# EAGLE board milliLearn-ice40 (EAGLE 9.5.1)
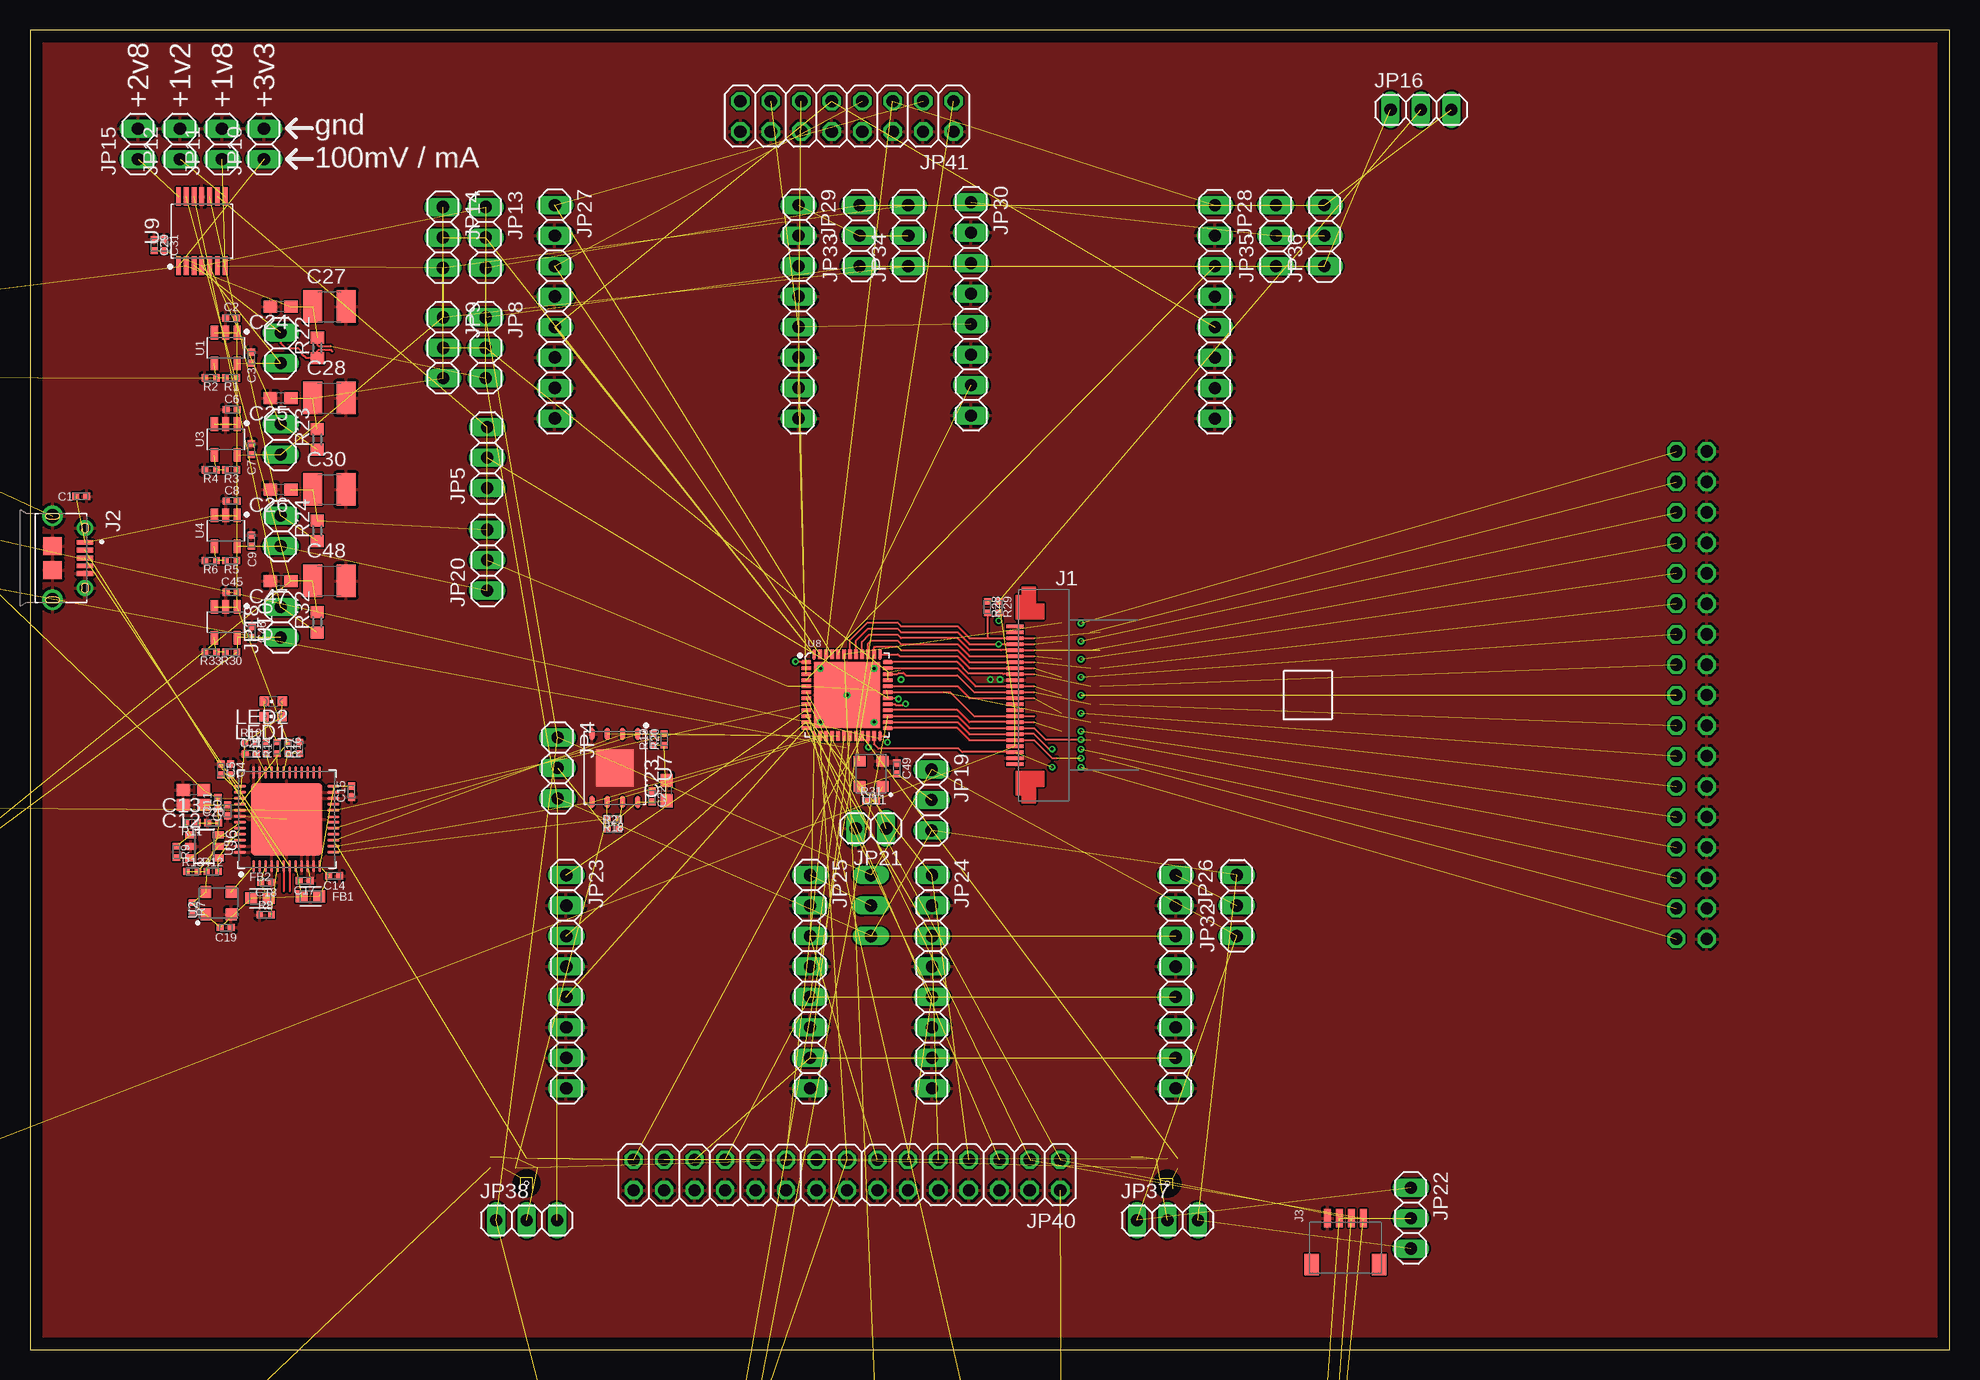
[diagram p0: board, top side]
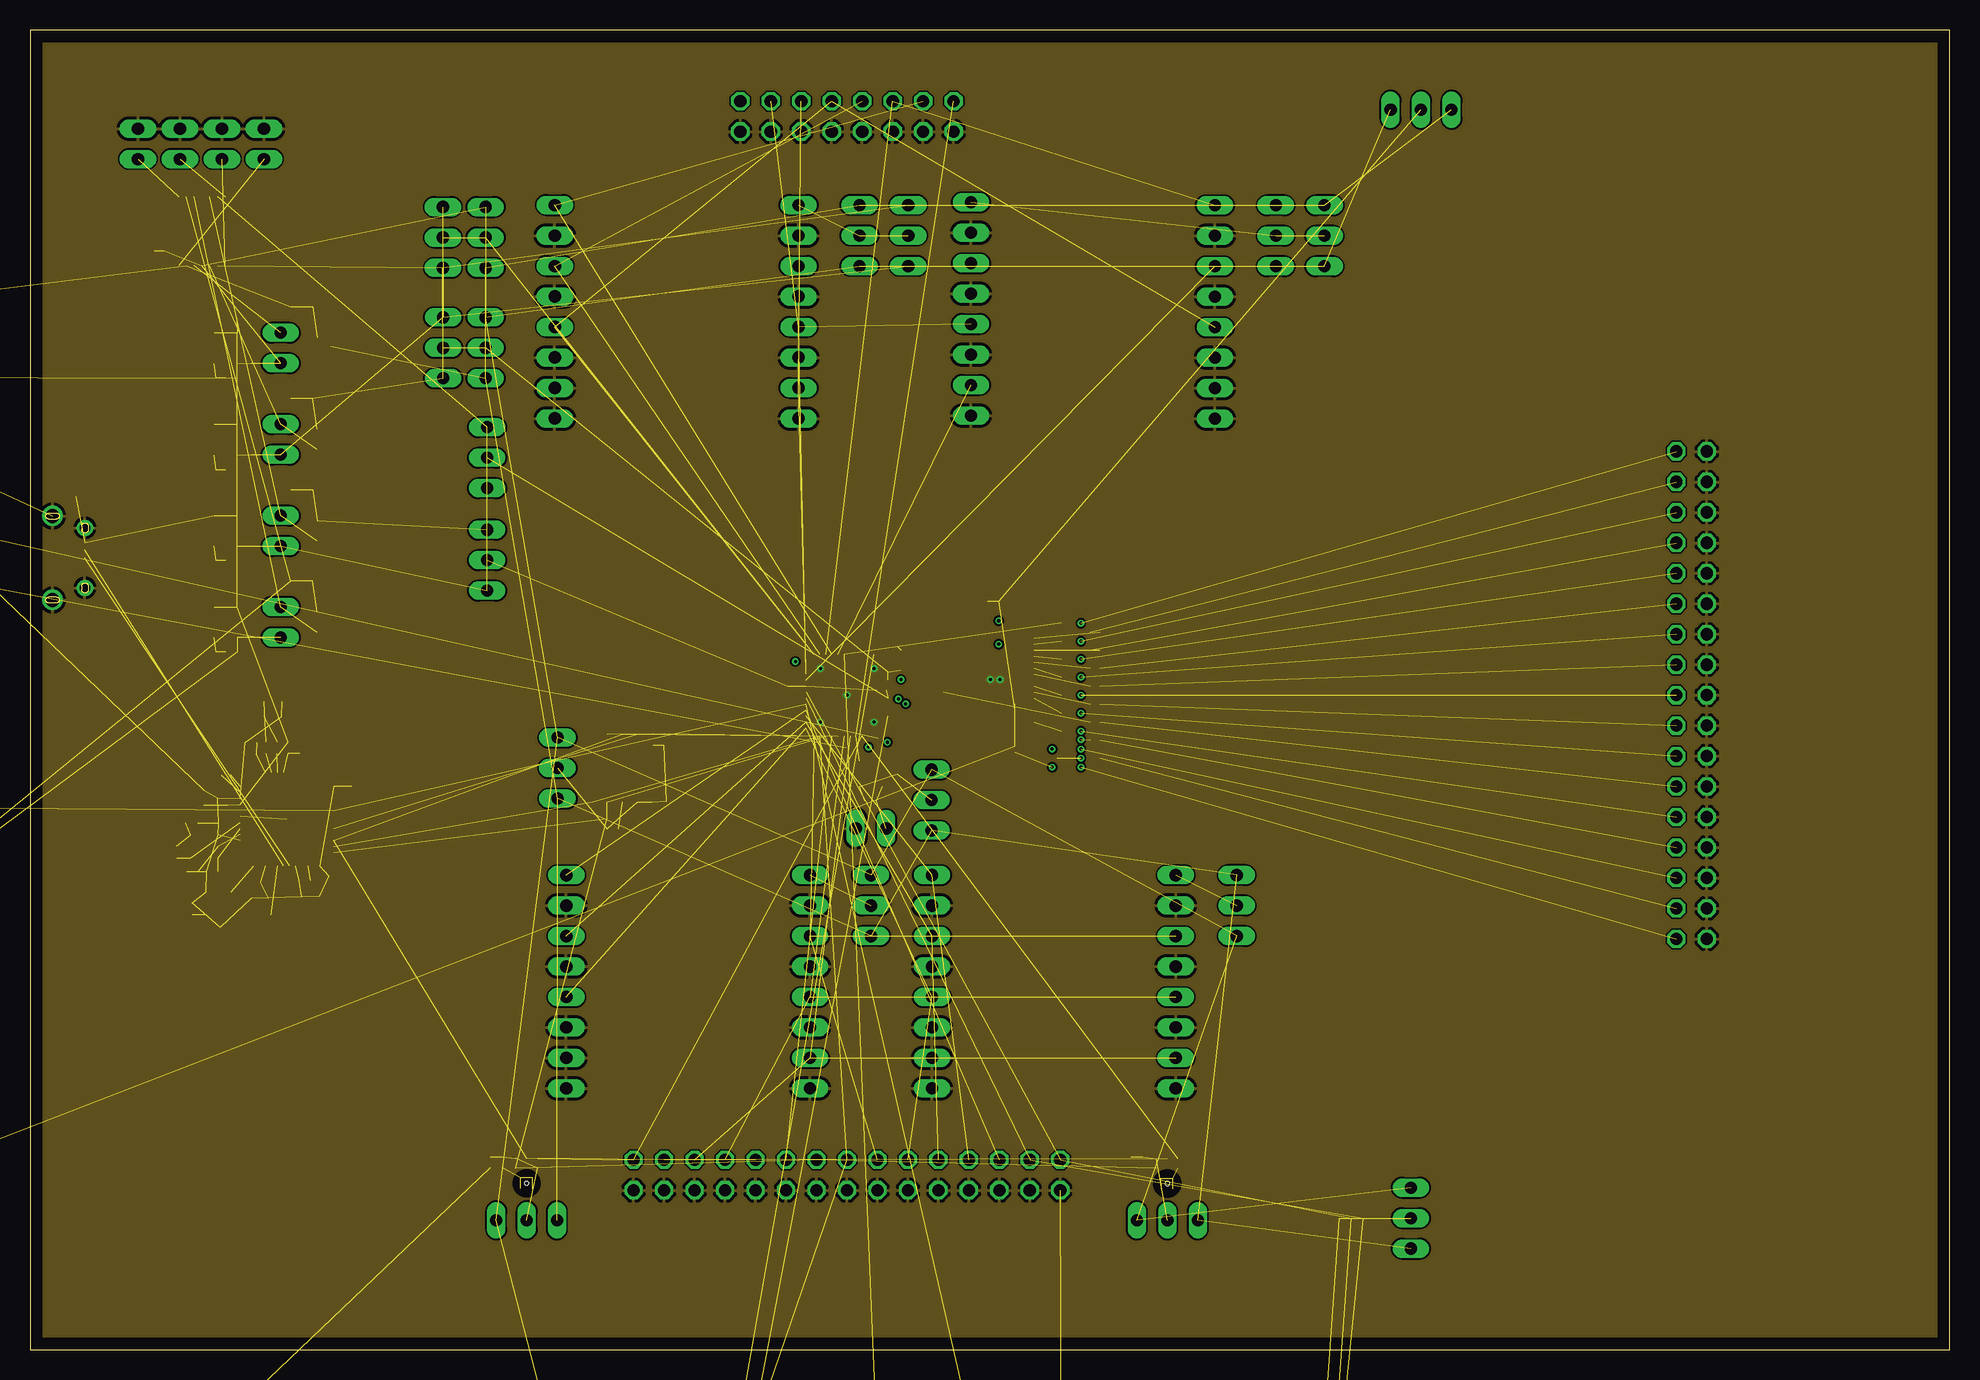
[diagram p1: board, inner layer Route2]
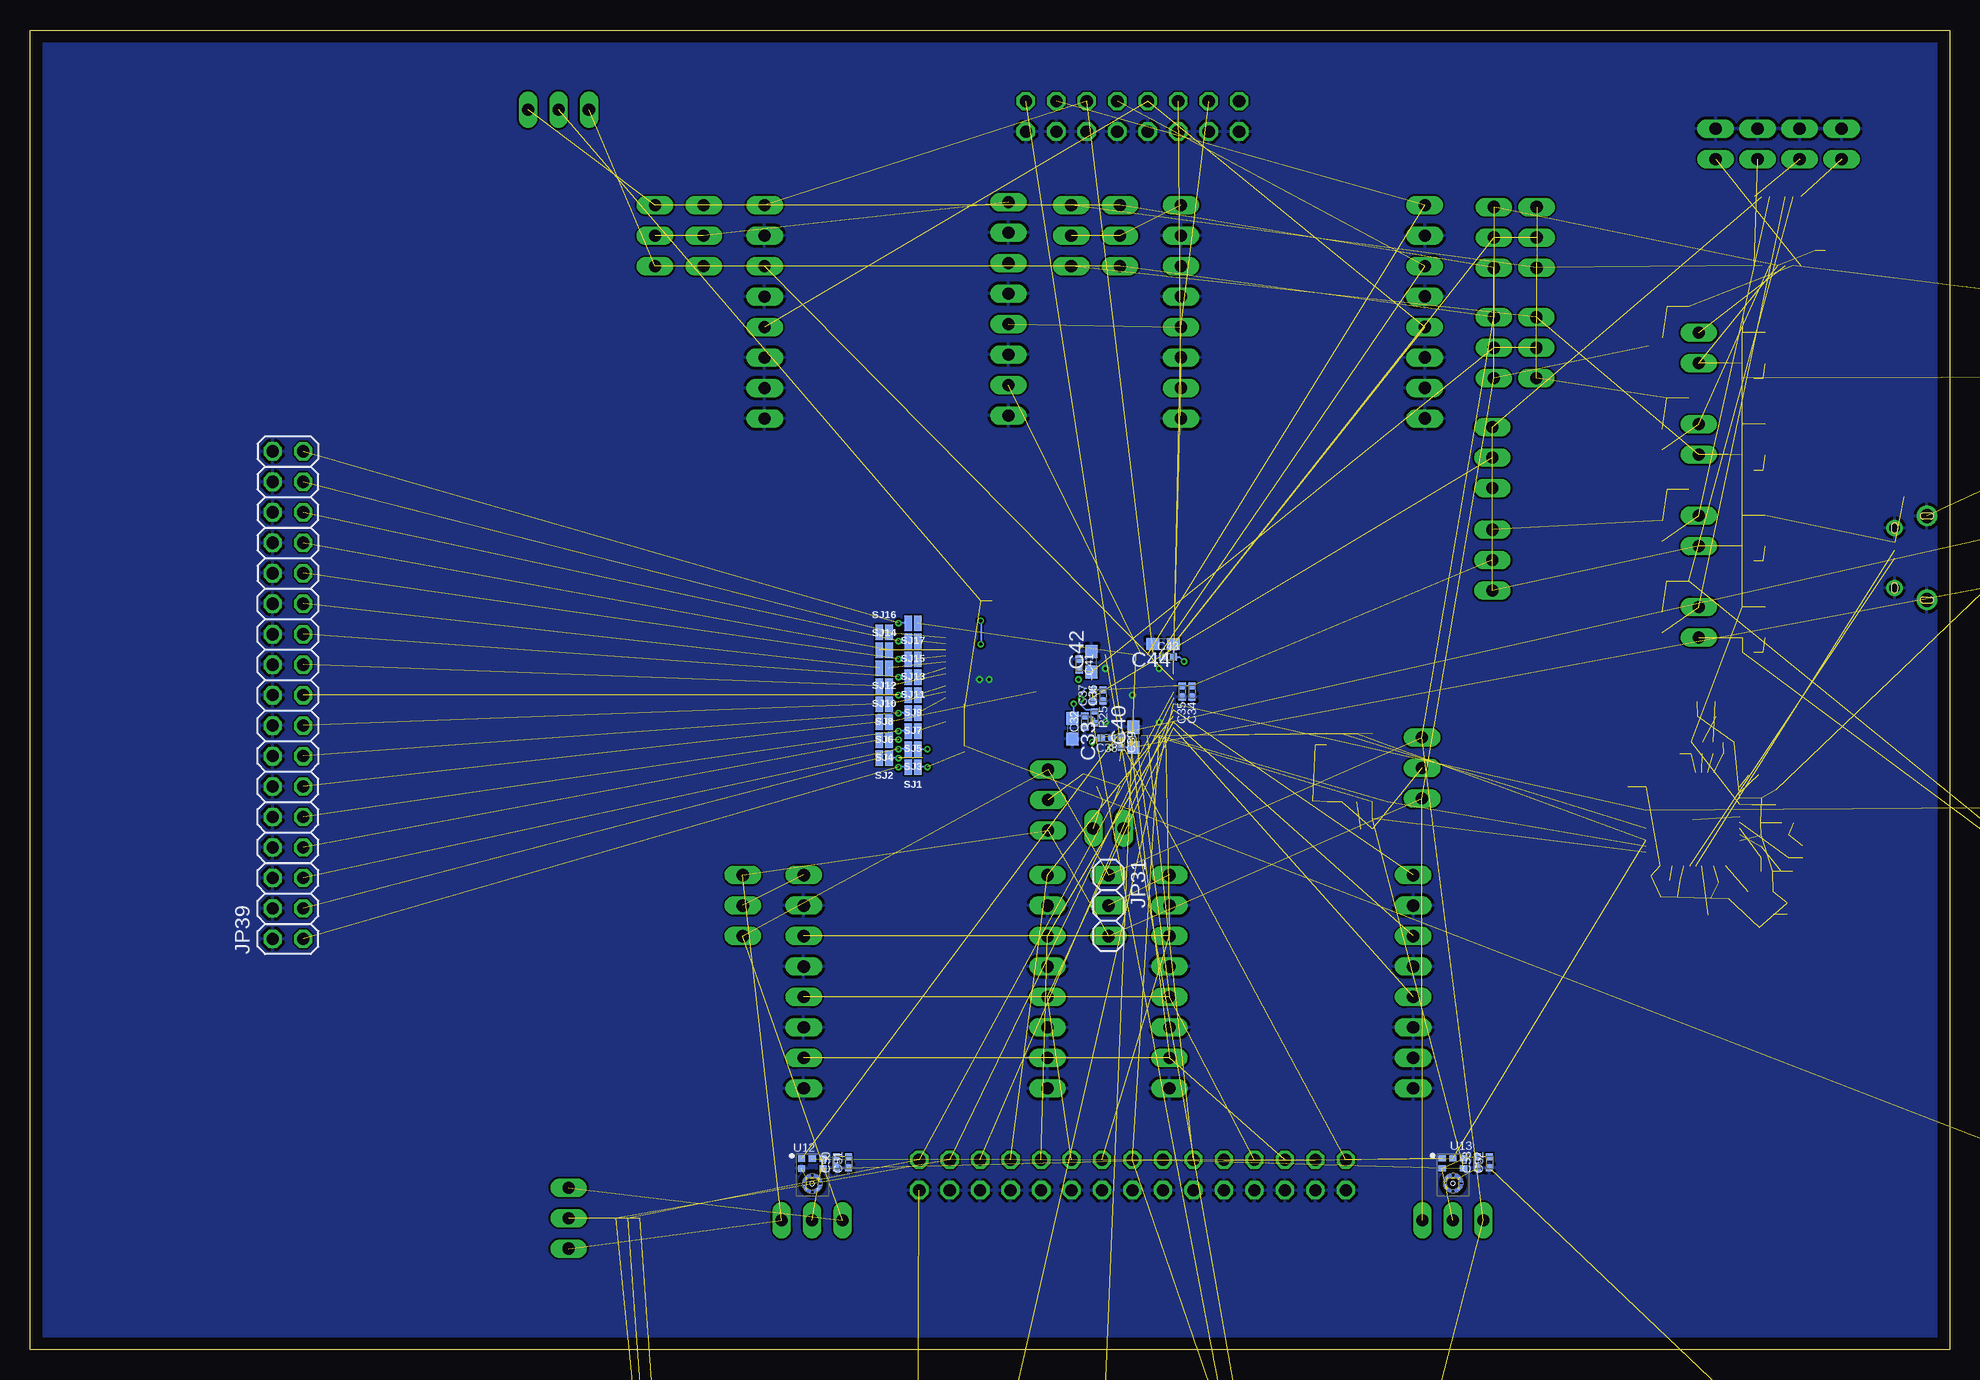
[diagram p2: board, bottom side, seen from below]

Size 160 x 110 mm. Coordinates in mm from the lower left corner, seen from the top.
Outline: 0,0 160,0 160,110 0,110 0,0
Copper layers (1+2*15+16): Top 0.035mm / dielectric 1.5mm / Route2 0.035mm / dielectric 0.15mm / Route15 0.035mm / dielectric 0.2mm / Bottom 0.035mm
Design rules "default *": minimum track width 6mil, minimum drill 10mil, track to track 6mil, track to pad 6mil, pad to pad 6mil, via to via 6mil, smd to smd 6mil, copper to edge 40mil, drill to drill 6mil, minimum pad ring 10mil, minimum via ring 6mil, stop-mask expansion 4mil, vias tented up to drill 0mil, thermal gap 10mil

## Footprints (pad centres in the part's own frame; a part is rotated, then mirrored left to right if it is on the bottom)
C0402_COMPACT = smd 0.585 x 0.6: 1 -0.458,0; 2 0.458,0
C0603 = smd 1.1 x 1: 1 -0.85,0; 2 0.85,0
C1210 = smd 1.6 x 2.7: 1 -1.4,0; 2 1.4,0
BLM18KG601SN1D = smd 1 x 0.97: 1 -0.735,0; 2 0.735,0
SFV24R-2STE1HLF = smd 0.3 x 1.4: P$1 -5.75,0; P$2 -5.25,0; P$3 -4.75,0; P$4 -4.25,0; P$5 -3.75,0; P$6 -3.25,0; P$7 -2.75,0; P$8 -2.25,0; P$9 -1.75,0; P$10 -1.25,0; P$11 -0.75,0; P$12 -0.25,0; P$13 0.25,0; P$14 0.75,0; P$15 1.25,0; P$16 1.75,0; P$17 2.25,0; P$18 2.75,0; P$19 3.25,0; P$20 3.75,0; P$21 4.25,0; P$22 4.75,0; P$23 5.25,0; P$24 5.75,0
AMPHENOL_10118194-0001LF = smd 0.4 x 1.35: 1 -1.3,2.7; 2 -0.65,2.7; 3 0,2.7; 4 0.65,2.7; 5 1.3,2.7 | drill 0.85: S1 -2.5,2.7; S2 2.5,2.7 | drill 1.15: S3 -3.5,0; S6 3.5,0 | smd 1.5 x 1.55: S4 -1,0; S5 1,0
SM04B-SRSS-TB(LF)(SN) = smd 1.2 x 1.8: NC@1 2.8,-3.875; NC@2 -2.8,-3.875 | smd 0.6 x 1.55: P$1 -1.5,0; P$2 -0.5,0; P$3 0.5,0; P$4 1.5,0
1X02 = drill 1.016 long: 1 -1.27,0; 2 1.27,0
1X03 = drill 1.016 long: 1 -2.54,0; 2 0,0; 3 2.54,0
1X08 = drill 1.016 long: 1 -8.89,0; 2 -6.35,0; 3 -3.81,0; 4 -1.27,0; 5 1.27,0; 6 3.81,0; 7 6.35,0; 8 8.89,0
2X17 = drill 1.016 octagon: 1 -20.32,-1.27; 2 -20.32,1.27; 3 -17.78,-1.27; 4 -17.78,1.27; 5 -15.24,-1.27; 6 -15.24,1.27; 7 -12.7,-1.27; 8 -12.7,1.27; 9 -10.16,-1.27; 10 -10.16,1.27; 11 -7.62,-1.27; 12 -7.62,1.27; 13 -5.08,-1.27; 14 -5.08,1.27; 15 -2.54,-1.27; 16 -2.54,1.27; 17 0,-1.27; 18 0,1.27; 19 2.54,-1.27; 20 2.54,1.27; 21 5.08,-1.27; 22 5.08,1.27; 23 7.62,-1.27; 24 7.62,1.27; 25 10.16,-1.27; 26 10.16,1.27; 27 12.7,-1.27; 28 12.7,1.27; 29 15.24,-1.27; 30 15.24,1.27; 31 17.78,-1.27; 32 17.78,1.27; 33 20.32,-1.27; 34 20.32,1.27
2X15 = drill 1.016 octagon: 1 -17.78,-1.27; 2 -17.78,1.27; 3 -15.24,-1.27; 4 -15.24,1.27; 5 -12.7,-1.27; 6 -12.7,1.27; 7 -10.16,-1.27; 8 -10.16,1.27; 9 -7.62,-1.27; 10 -7.62,1.27; 11 -5.08,-1.27; 12 -5.08,1.27; 13 -2.54,-1.27; 14 -2.54,1.27; 15 0,-1.27; 16 0,1.27; 17 2.54,-1.27; 18 2.54,1.27; 19 5.08,-1.27; 20 5.08,1.27; 21 7.62,-1.27; 22 7.62,1.27; 23 10.16,-1.27; 24 10.16,1.27; 25 12.7,-1.27; 26 12.7,1.27; 27 15.24,-1.27; 28 15.24,1.27; 29 17.78,-1.27; 30 17.78,1.27
2X08 = drill 1.016 octagon: 1 -8.89,-1.27; 2 -8.89,1.27; 3 -6.35,-1.27; 4 -6.35,1.27; 5 -3.81,-1.27; 6 -3.81,1.27; 7 -1.27,-1.27; 8 -1.27,1.27; 9 1.27,-1.27; 10 1.27,1.27; 11 3.81,-1.27; 12 3.81,1.27; 13 6.35,-1.27; 14 6.35,1.27; 15 8.89,-1.27; 16 8.89,1.27
CHIPLED_0603 = smd 0.8 x 0.8: A 0,-0.75; C 0,0.75
R0402_COMPACT = smd 0.535 x 0.6: 1 -0.482,0; 2 0.482,0
R0603 = smd 1 x 1.1: 1 -0.85,0; 2 0.85,0
SMT-JUMPER_2_NC_PASTE_NO-SILK = smd 0.635 x 1.27: 1 -0.406,0; 2 0.406,0
TE_FSMJSMA = smd 1.3 x 2.1: P$1 -2.3,4.55; P$2 -2.3,-4.55; P$3 2.3,4.55; P$4 2.3,-4.55
AP7366-W5-7 = smd 1.146 x 0.597: 1 -1.287,0.95; 2 -1.287,0; 3 -1.287,-0.95; 4 1.287,-0.95; 5 1.287,0.95
DSC6111CI2A-012.0000 = smd 1 x 0.9: P$1 -0.95,1.05; P$2 -0.95,-1.05; P$3 0.95,-1.05; P$4 0.95,1.05
MICROBUILDER_QFN48_8MM = smd 1 x 0.23: 1 -3.9,2.75; 2 -3.9,2.25; 3 -3.9,1.75; 4 -3.9,1.25; 5 -3.9,0.75; 6 -3.9,0.25; 7 -3.9,-0.25; 8 -3.9,-0.75; 9 -3.9,-1.25; 10 -3.9,-1.75; 11 -3.9,-2.25; 12 -3.9,-2.75; 25 3.9,-2.75; 26 3.9,-2.25; 27 3.9,-1.75; 28 3.9,-1.25; 29 3.9,-0.75; 30 3.9,-0.25; 31 3.9,0.25; 32 3.9,0.75; 33 3.9,1.25; 34 3.9,1.75; 35 3.9,2.25; 36 3.9,2.75 | smd 0.23 x 1: 13 -2.75,-3.9; 14 -2.25,-3.9; 15 -1.75,-3.9; 16 -1.25,-3.9; 17 -0.75,-3.9; 18 -0.25,-3.9; 19 0.2,-3.9; 20 0.75,-3.9; 21 1.25,-3.9; 22 1.75,-3.9; 23 2.25,-3.9; 24 2.75,-3.9; 37 2.75,3.9; 38 2.25,3.9; 39 1.75,3.9; 40 1.25,3.9; 41 0.75,3.9; 42 0.25,3.9; 43 -0.25,3.9; 44 -0.75,3.9; 45 -1.25,3.9; 46 -1.75,3.9; 47 -2.25,3.9; 48 -2.75,3.9 | smd 6 x 6: THERMAL 0,0
MICROCHIP_SOT23-6 = smd 0.6 x 0.9: 1 -0.95,-1.15; 2 0,-1.15; 3 0.95,-1.15; 4 0.95,1.15; 5 0,1.15; 6 -0.95,1.15
MT25QL128ABA1EW7 = smd 1.038 x 0.42: 1 -2.846,1.905; 2 -2.846,0.635; 3 -2.846,-0.635; 4 -2.846,-1.905; 5 2.846,-1.905; 6 2.846,-0.635; 7 2.846,0.635; 8 2.846,1.905 | smd 3.1 x 3.1: 9 0,0
ICE40UP5K/3K-SG48 = smd 0.8 x 0.3: 1 -3.4,2.75; 2 -3.4,2.25; 3 -3.4,1.75; 4 -3.4,1.25; 5 -3.4,0.75; 6 -3.4,0.25; 7 -3.4,-0.25; 8 -3.4,-0.75; 9 -3.4,-1.25; 10 -3.4,-1.75; 11 -3.4,-2.25; 12 -3.4,-2.75; 25 3.4,-2.75; 26 3.4,-2.25; 27 3.4,-1.75; 28 3.4,-1.25; 29 3.4,-0.75; 30 3.4,-0.25; 31 3.4,0.25; 32 3.4,0.75; 33 3.4,1.25; 34 3.4,1.75; 35 3.4,2.25; 36 3.4,2.75 | smd 0.3 x 0.8: 13 -2.75,-3.4; 14 -2.25,-3.4; 15 -1.75,-3.4; 16 -1.25,-3.4; 17 -0.75,-3.4; 18 -0.25,-3.4; 19 0.25,-3.4; 20 0.75,-3.4; 21 1.25,-3.4; 22 1.75,-3.4; 23 2.25,-3.4; 24 2.75,-3.4; 37 2.75,3.4; 38 2.25,3.4; 39 1.75,3.4; 40 1.25,3.4; 41 0.75,3.4; 42 0.25,3.4; 43 -0.25,3.4; 44 -0.75,3.4; 45 -1.25,3.4; 46 -1.75,3.4; 47 -2.25,3.4; 48 -2.75,3.4 | smd 5.5 x 5.5: 49 0,0
INA4180A4IPWR = smd 1.559 x 0.407: 1 -2.878,1.95; 2 -2.878,1.3; 3 -2.878,0.65; 4 -2.878,0; 5 -2.878,-0.65; 6 -2.878,-1.3; 7 -2.878,-1.95; 8 2.878,-1.95; 9 2.878,-1.3; 10 2.878,-0.65; 11 2.878,0; 12 2.878,0.65; 13 2.878,1.3; 14 2.878,1.95
SPH0645LM4H-B = smd 0.6 x 0.522: P$1 -0.9,1.359; P$2 -0.9,0.537; P$4 0.9,0.537; P$5 0.9,1.359; P$6 0,1.359 | smd 0.25 x 0.25: P$3@0 -0.48,-0.26; P$3@1 0.51,-0.28; P$3@2 -0.48,-1.17; P$3@3 0.5,-1.14 | hole 0.325: 0,-0.715

## Placement (x,y rotation side)
C1  [C0402_COMPACT]  4.27,71.12 180 top
C2  1u  [C0402_COMPACT]  16.78,85.98 0 top
C3  1u  [C0402_COMPACT]  18.46,82.68 270 top
C4  100n  [C0402_COMPACT]  16.73,48.34 270 top
C5  100n  [C0402_COMPACT]  15.92,48.34 270 top
C6  1u  [C0402_COMPACT]  16.83,78.36 0 top
C7  1u  [C0402_COMPACT]  18.46,75.06 270 top
C8  1u  [C0402_COMPACT]  16.83,70.74 0 top
C9  1u  [C0402_COMPACT]  18.46,67.44 270 top
C10  100n  [C0402_COMPACT]  16.48,44.93 90 top
C11  100n  [C0402_COMPACT]  15.67,45.54 90 top
C12  4.7u  [C0603]  13.63,45.39 180 top
C13  4.7u  [C0603]  13.63,46.66 180 top
C14  100n  [C0402_COMPACT]  25.35,39.5 180 top
C15  100n  [C0402_COMPACT]  26.8,46.5 90 top
C16  100n  [C0402_COMPACT]  -21.29,80.41 0 top  (outside the outline)
C17  100n  [C0402_COMPACT]  22.88,39.09 180 top
C18  100n  [C0402_COMPACT]  19.68,38.94 180 top
C19  100n  [C0402_COMPACT]  16.33,35.18 180 top
C20  100n  [C0402_COMPACT]  15.26,43.92 0 top
C21  10n  [C0402_COMPACT]  18.41,49.66 0 top
C22  100n  [C0402_COMPACT]  51.84,46.09 270 top
C23  4.7u  [C0603]  53.06,46.59 90 top
C24  4.7u  [C0603]  20.89,86.94 180 top
C25  4.7u  [C0603]  20.89,79.32 180 top
C26  4.7u  [C0603]  20.89,71.7 180 top
C27  22u  [C1210]  24.96,86.94 0 top
C28  22u  [C1210]  24.96,79.32 0 top
C29  1u  [C0402_COMPACT]  10.36,92.07 270 top
C30  22u  [C1210]  24.96,71.7 0 top
C31  100n  [C0402_COMPACT]  11.18,92.07 270 top
C32  100n  [C0402_COMPACT]  72.08,52.35 90 bottom
C33  4.7u  [C0603]  73.1,51.74 270 bottom
C34  1u  [C0402_COMPACT]  63.14,54.84 90 bottom
C35  100n  [C0402_COMPACT]  63.95,54.84 90 bottom
C36  1u  [C0402_COMPACT]  70.56,54.54 90 bottom
C37  100n  [C0402_COMPACT]  71.37,54.54 90 bottom
C38  100n  [C0402_COMPACT]  70.25,50.98 180 bottom
C39  100n  [C0402_COMPACT]  69.03,50.63 270 bottom
C40  4.7u  [C0603]  68.02,51.03 90 bottom
C41  100n  [C0402_COMPACT]  72.55,57.1 270 bottom
C42  4.7u  [C0603]  71.52,57.33 90 bottom
C43  100n  [C0402_COMPACT]  65.15,57.75 0 bottom
C44  4.7u  [C0603]  65.55,58.8 180 bottom
C45  1u  [C0402_COMPACT]  16.83,63.12 0 top
C46  1u  [C0402_COMPACT]  18.51,59.82 270 top
C47  4.7u  [C0603]  20.89,64.08 180 top
C48  22u  [C1210]  24.96,64.08 0 top
C49  100n  [C0402_COMPACT]  72.25,48.45 270 top
C50  100n  [C0402_COMPACT]  92.78,15.59 90 bottom
C51  220p  [C0402_COMPACT]  91.76,15.59 90 bottom
C52  100n  [C0402_COMPACT]  38.35,15.59 90 bottom
C53  220p  [C0402_COMPACT]  39.36,15.59 90 bottom
C54  100n  [C0402_COMPACT]  82.45,-32.87 0 top  (outside the outline)
FB1  BLM18KG601SN1D  [BLM18KG601SN1D]  23.39,37.77 180 top
FB2  BLM18KG601SN1D  [BLM18KG601SN1D]  19.17,37.62 0 top
J1  SFV24R-2STE1HLF  [SFV24R-2STE1HLF]  82.1,54.55 90 top
J2  10118194-0001LF  [AMPHENOL_10118194-0001LF]  1.88,65.99 270 top
J3  SM04B-SRSS-TB(LF)(SN)  [SM04B-SRSS-TB(LF)(SN)]  109.64,10.94 0 top
JP1  [1X02]  20.89,83.49 90 top
JP2  [1X02]  20.89,75.87 90 top
JP3  [1X02]  20.89,68.25 90 top
JP4  [1X03]  43.97,48.47 270 top
JP5  [1X03]  38.1,74.35 90 top
JP6  [1X03]  -63.41,81.17 0 top  (outside the outline)
JP7  [1X03]  -63.41,74.82 0 top  (outside the outline)
JP8  [1X03]  37.99,83.51 270 top
JP9  [1X03]  34.43,83.51 270 top
JP10  [1X02]  19.5,100.5 90 top
JP11  [1X02]  16,100.5 90 top
JP12  [1X02]  12.5,100.5 90 top
JP13  [1X03]  37.97,92.71 270 top
JP14  [1X03]  34.42,92.71 270 top
JP15  [1X02]  9,100.5 90 top
JP16  [1X03]  115.95,103.35 0 top
JP17  [1X03]  -69.76,-8.39 0 top  (outside the outline)
JP18  [1X02]  20.89,60.63 90 top
JP19  [1X03]  75.15,45.8 270 top
JP20  [1X03]  38.1,65.8 90 top
JP21  [1X02]  70.1,43.45 180 top
JP22  [1X03]  115.1,10.95 270 top
JP23  [1X08]  44.7,30.65 270 top
JP24  [1X08]  75.18,30.65 270 top
JP25  [1X08]  65.02,30.65 270 top
JP26  [1X08]  95.5,30.65 270 top
JP27  [1X08]  43.74,86.51 270 top
JP28  [1X08]  98.76,86.5 270 top
JP29  [1X08]  64.06,86.51 270 top
JP30  [1X08]  78.44,86.75 270 top
JP31  [1X03]  70.1,37 270 bottom
JP32  [1X03]  100.58,37 90 top
JP33  [1X03]  69.14,92.86 90 top
JP34  [1X03]  73.21,92.86 90 top
JP35  [1X03]  103.84,92.85 90 top
JP36  [1X03]  107.91,92.85 90 top
JP37  [1X03]  94.81,10.76 0 top
JP38  [1X03]  41.4,10.76 0 top
JP39  [2X17]  138.5,54.55 90 bottom
JP40  [2X15]  68.1,14.55 180 top
JP41  [2X08]  68.1,102.8 180 top
LED1  [CHIPLED_0603]  20.24,52.76 90 top
LED2  [CHIPLED_0603]  20.29,54.03 90 top
LED3  [CHIPLED_0603]  54.51,-32.87 0 top  (outside the outline)
LED4  [CHIPLED_0603]  48.16,-43.03 0 top  (outside the outline)
LED5  [CHIPLED_0603]  48.16,-70.97 0 top  (outside the outline)
LED6  [CHIPLED_0603]  -71.7,-90.4 0 top  (outside the outline)
R1  75k 1%  [R0402_COMPACT]  16.78,81 180 top
R2  24k 1%  [R0402_COMPACT]  15.05,81 180 top
R3  20k 1%  [R0402_COMPACT]  16.78,73.33 180 top
R4  16k 1%  [R0402_COMPACT]  15.05,73.33 180 top
R5  12k 1%  [R0402_COMPACT]  16.78,65.76 180 top
R6  24k 1%  [R0402_COMPACT]  15.05,65.76 180 top
R7  10k  [R0402_COMPACT]  13.53,36.75 270 top
R8  12k 1%  [R0402_COMPACT]  19.63,36.25 0 top
R9  2.2k  [R0402_COMPACT]  12.21,41.48 270 top
R10  10k  [R0402_COMPACT]  18.41,50.62 0 top
R11  10k  [R0402_COMPACT]  13.48,43.92 180 top
R12  DNP  [R0402_COMPACT]  15.21,39.85 0 top
R13  DNP  [R0402_COMPACT]  13.53,39.85 0 top
R14  1k  [R0402_COMPACT]  20.59,50.16 90 top
R15  1k  [R0402_COMPACT]  19.68,50.16 90 top
R16  4.7k  [R0402_COMPACT]  21.51,50.16 270 top
R17  12k  [R0402_COMPACT]  22.47,50.16 90 top
R18  10k  [R0402_COMPACT]  48.59,44.26 180 top
R19  10k  [R0402_COMPACT]  51.94,50.86 90 top
R20  10k  [R0402_COMPACT]  52.86,50.86 90 top
R21  10k  [R0402_COMPACT]  48.59,43.39 0 top
R22  0.5 1%  [R0603]  23.95,83.5 90 top
R23  0.5 1%  [R0603]  23.94,75.87 90 top
R24  0.5 1%  [R0603]  23.94,68.25 90 top
R25  100  [R0402_COMPACT]  71.27,52.71 270 bottom
R26  10k  [R0402_COMPACT]  -67.22,45.61 0 top  (outside the outline)
R27  1k  [R0402_COMPACT]  51.97,-37.95 0 top  (outside the outline)
R28  10k  [R0402_COMPACT]  79.8,61.9 270 top
R29  10k  [R0402_COMPACT]  80.75,61.9 270 top
R30  30k 1%  [R0402_COMPACT]  16.78,58.14 180 top
R31  10k  [R0402_COMPACT]  70.1,45.75 0 top
R32  0.5 1%  [R0603]  23.94,60.63 90 top
R33  12k 1%  [R0402_COMPACT]  15.05,58.14 180 top
R34  4.7k  [R0402_COMPACT]  108.37,-6.76 0 top  (outside the outline)
R35  4.7k  [R0402_COMPACT]  108.37,-11.84 0 top  (outside the outline)
R36  1k  [R0402_COMPACT]  51.97,-43.03 0 top  (outside the outline)
R37  1k  [R0402_COMPACT]  50.7,-69.7 0 top  (outside the outline)
R38  1k  [R0402_COMPACT]  -72.8,-93.6 0 top  (outside the outline)
SJ1  JUMPER-SMT_2_NC_PASTE_NO-SILK  [SMT-JUMPER_2_NC_PASTE_NO-SILK]  86.4,48.55 180 bottom
SJ2  JUMPER-SMT_2_NC_PASTE_NO-SILK  [SMT-JUMPER_2_NC_PASTE_NO-SILK]  88.8,49.3 180 bottom
SJ3  JUMPER-SMT_2_NC_PASTE_NO-SILK  [SMT-JUMPER_2_NC_PASTE_NO-SILK]  86.4,50.05 180 bottom
SJ4  JUMPER-SMT_2_NC_PASTE_NO-SILK  [SMT-JUMPER_2_NC_PASTE_NO-SILK]  88.8,50.8 180 bottom
SJ5  JUMPER-SMT_2_NC_PASTE_NO-SILK  [SMT-JUMPER_2_NC_PASTE_NO-SILK]  86.4,51.55 180 bottom
SJ6  JUMPER-SMT_2_NC_PASTE_NO-SILK  [SMT-JUMPER_2_NC_PASTE_NO-SILK]  88.8,52.3 180 bottom
SJ7  JUMPER-SMT_2_NC_PASTE_NO-SILK  [SMT-JUMPER_2_NC_PASTE_NO-SILK]  86.4,53.05 180 bottom
SJ8  JUMPER-SMT_2_NC_PASTE_NO-SILK  [SMT-JUMPER_2_NC_PASTE_NO-SILK]  88.8,53.8 180 bottom
SJ9  JUMPER-SMT_2_NC_PASTE_NO-SILK  [SMT-JUMPER_2_NC_PASTE_NO-SILK]  86.4,54.55 180 bottom
SJ10  JUMPER-SMT_2_NC_PASTE_NO-SILK  [SMT-JUMPER_2_NC_PASTE_NO-SILK]  88.8,55.3 180 bottom
SJ11  JUMPER-SMT_2_NC_PASTE_NO-SILK  [SMT-JUMPER_2_NC_PASTE_NO-SILK]  86.4,56.05 180 bottom
SJ12  JUMPER-SMT_2_NC_PASTE_NO-SILK  [SMT-JUMPER_2_NC_PASTE_NO-SILK]  88.8,56.8 180 bottom
SJ13  JUMPER-SMT_2_NC_PASTE_NO-SILK  [SMT-JUMPER_2_NC_PASTE_NO-SILK]  86.4,57.55 180 bottom
SJ14  JUMPER-SMT_2_NC_PASTE_NO-SILK  [SMT-JUMPER_2_NC_PASTE_NO-SILK]  88.8,58.3 0 bottom
SJ15  JUMPER-SMT_2_NC_PASTE_NO-SILK  [SMT-JUMPER_2_NC_PASTE_NO-SILK]  86.4,59.05 180 bottom
SJ16  JUMPER-SMT_2_NC_PASTE_NO-SILK  [SMT-JUMPER_2_NC_PASTE_NO-SILK]  88.8,59.8 0 bottom
SJ17  JUMPER-SMT_2_NC_PASTE_NO-SILK  [SMT-JUMPER_2_NC_PASTE_NO-SILK]  86.4,60.55 180 bottom
SW1  [TE_FSMJSMA]  83.72,-23.98 0 top  (outside the outline)
SW2  [TE_FSMJSMA]  73.56,-29.06 0 top  (outside the outline)
U1  AP7366-W5-7  [AP7366-W5-7]  16.32,83.49 270 top
U2  DSC6111CI2A-012.0000  [DSC6111CI2A-012.0000]  15.72,37.21 90 top
U3  AP7366-W5-7  [AP7366-W5-7]  16.32,75.87 270 top
U4  AP7366-W5-7  [AP7366-W5-7]  16.32,68.25 270 top
U5  MICROBUILDER_FT232HQ  [MICROBUILDER_QFN48_8MM]  21.4,44.2 90 top
U6  MICROCHIP_93LC76B  [MICROCHIP_SOT23-6]  14.55,41.94 270 top
U7  MT25QL128ABA1EW7  [MT25QL128ABA1EW7]  48.74,48.47 270 top
U8  ICE40UP5K/3K-SG48  [ICE40UP5K/3K-SG48]  68.1,54.55 0 top
U9  INA4180A4IPWR  [INA4180A4IPWR]  14.33,93.24 90 top
U10  AP7366-W5-7  [AP7366-W5-7]  16.32,60.63 270 top
U11  DSC6111CI2A-012.0000  [DSC6111CI2A-012.0000]  70.1,48 180 top
U12  SPH0645LM4H-B  [SPH0645LM4H-B]  94.8,14.55 0 bottom
U13  SPH0645LM4H-B  [SPH0645LM4H-B]  41.4,14.57 0 bottom

## Library data of the parts
C1 C32 C38 J1 J3 R25 SW1 SW2 U2 U7 U8 U11 = milliLearn-ice40
C2 C3 C6-C9 C29 C34 C36 C45 C46 = milliLearn-ice40; MFR: SAMSUNG; MFR_PN: CL05A105KO5NNNC
C4 C5 C10 C11 C14-C20 C22 C31 C35 C37 C39 C41 C43 C49 C50 C52 C54 = milliLearn-ice40; MFR: SAMSUNG; MFR_PN: CL05B104KO5NNNC
C12 C13 C23-C26 C33 C40 C42 C44 C47 = rcl; MFR: SAMSUNG; MFR_PN: CL10A475KA8NQNC; SPICEPREFIX: C
C21 = milliLearn-ice40; MFR: SAMSUNG; MFR_PN: CL05B103KO5NNNC
C27 C28 C30 C48 = rcl; MFR: AVX CORPORATION; MFR_PN: 12103C226KAT2A; SPICEPREFIX: C
C51 C53 = milliLearn-ice40; MFR: SAMSUNG; MFR_PN: CL05B221KB5NNNC
FB1 FB2 = milliLearn-ice40; MFR: MURATA; MFR_PN: BLM18KG601SN1D
J2 = milliLearn-ice40; AVAILABILITY: Unavailable; DESCRIPTION: Micro Usb, 2.0 Type b, Rcpt, Smt; MF: Amphenol ICC; MP: 10118194-0001LF; PACKAGE: None; PRICE: None
JP1-JP3 JP10-JP12 JP15 JP18 = pinhead; MFR: WURTH ELECTRONIK; MFR_PN: 61300211121
JP4-JP9 JP13 JP14 JP16 JP17 JP19-JP41 = pinhead
LED1-LED6 = led; MFR: LITE-ON; MFR_PN: LTST-C191KRKT
R1 = milliLearn-ice40; MFR: PANASONIC; MFR_PN: ERJ-2RKF7502X
R2 R6 = milliLearn-ice40; MFR: PANASONIC; MFR_PN: ERJ-2RKF2402X
R3 = milliLearn-ice40; MFR: PANASONIC; MFR_PN: ERJ-2RKF2002X
R4 = milliLearn-ice40; MFR: PANASONIC; MFR_PN: ERJ-2RKF1602X
R5 R8 R17 R33 = milliLearn-ice40; MFR: PANASONIC; MFR_PN: ERJ-2RKF1202X
R7 R10-R13 R18-R21 R26 R28 R29 R31 = milliLearn-ice40; MFR: PANASONIC; MFR_PN: ERJ-2RKF1002X
R9 = milliLearn-ice40; MFR: PANASONIC; MFR_PN: ERJ-2RKF2201X
R14 R15 R27 R36-R38 = milliLearn-ice40; MFR: PANASONIC; MFR_PN: ERJ-2RKF1001X
R16 R34 R35 = milliLearn-ice40; MFR: PANASONIC; MFR_PN: ERJ-2RKF4701X
R22-R24 R32 = rcl; MFR: YAGEO; MFR_PN: RL0603FR-070R5L; SPICEPREFIX: R
R30 = milliLearn-ice40; MFR: PANASONIC; MFR_PN: ERJ-2RKF3002X
SJ1-SJ17 = SparkFun-Jumpers
U1 U3 U4 U10 = milliLearn-ice40; MFR: Diodes Inc; MFR_PN: AP7366-W5-7
U5 = gtjennings_pcb_121217_1200_release
U6 = milliLearn-ice40; MF: MICROCHIP; MFR: MICROCHIP; MFR_PN: 93LC56BT-I/OT; MPN: 93LC76BT-I/OT; OC_FARNELL: 1556170; OC_NEWARK: 61H6848
U9 = milliLearn-ice40; MFR: TI; MFR_PN: INA4180A4IPWR
U12 U13 = milliLearn-ice40; MFR: KNOWLES; MFR_PN: SPH0645LM4H-B

## Nets
+1V2: C9.2 JP3.1 JP5.1 JP20.1 R5.1 U4.5
+1V2_METERED: C26.1 C30.1 JP5.3 JP20.3 R24.2 U9.9
+1V8: C7.2 JP2.1 JP9.1 JP14.1 JP16.1 JP34.1 JP36.1 R3.1 U3.5
+1V8_METERED: C25.1 C28.1 JP9.3 JP14.3 JP16.3 JP34.3 JP36.3 R23.2 U9.6
+2V8: C46.2 JP17.1 JP18.1 R30.1 U10.5
+2V8_METERED: C47.1 C48.1 JP17.3 R32.2 U9.13
+3V3: C3.2 C29.2 C31.2 JP1.1 JP4.1 JP6.1 JP7.1 JP8.1 JP13.1 JP19.1 JP22.1 JP31.1 JP32.1 JP33.1 JP35.1 JP37.1 JP38.1 R1.1 R27.1 R36.1 R37.1 R38.1 U1.5 U9.4
+3V3_METERED: C24.1 C27.1 JP4.3 JP6.3 JP7.3 JP8.3 JP13.3 JP19.3 JP22.3 JP31.3 JP32.3 JP33.3 JP35.3 JP37.3 JP38.3 R22.2 U9.2
CONFIG_FLASH_+3V3: C22.2 C23.1 JP4.2 R18.1 R19.1 R20.1 R21.1 U7.8
D+: J2.3 U5.7
D-: J2.2 U5.6
FT232_OSC_12M: U2.P$3 U5.1
FT232_VCCD: C11.2 C13.1 C14.2 C15.2 C16.2 C19.2 C20.2 FB1.1 FB2.1 LED1.A LED2.A R7.1 R10.1 R11.1 R12.1 R13.1 U2.P$4 U5.12 U5.24 U5.39 U5.46 U6.6
GND: C1.1 C2.1 C3.1 C4.1 C5.1 C6.1 C7.1 C8.1 C9.1 C10.1 C11.1 C12.2 C13.2 C14.1 C15.1 C16.1 C17.1 C18.1 C19.1 C20.1 C21.1 C22.1 C23.2 C24.2 C25.2 C26.2 C27.2 C28.2 C29.1 C30.2 C31.1 C32.1 C33.2 C34.1 C35.1 C36.1 C37.1 C38.1 C39.1 C40.2 C41.1 C42.2 C43.1 C44.2 C45.1 C46.1 C47.2 C48.2 C49.1 C50.1 C51.1 C52.1 C53.1 C54.1 J1.P$2 J1.P$15 J2.5 J2.S1 J2.S2 J2.S3 J2.S4 J2.S5 J2.S6 J3.P$1 JP10.2 JP11.2 JP12.2 JP15.2 JP21.2 JP23.2 JP23.4 JP23.6 JP23.7 JP23.8 JP24.2 JP24.4 JP24.6 JP24.7 JP24.8 JP25.2 JP25.4 JP25.6 JP25.8 JP26.2 JP26.4 JP26.6 JP26.8 JP27.2 JP27.4 JP27.6 JP27.7 JP27.8 JP28.2 JP28.4 JP28.6 JP28.7 JP28.8 JP29.2 JP29.4 JP29.6 JP29.8 JP30.2 JP30.4 JP30.6 JP30.8 JP39.2 JP39.4 JP39.6 JP39.8 JP39.10 JP39.12 JP39.14 JP39.16 JP39.18 JP39.20 JP39.22 JP39.24 JP39.26 JP39.28 JP39.30 JP39.32 JP39.34 JP40.2 JP40.4 JP40.6 JP40.8 JP40.10 JP40.12 JP40.14 JP40.16 JP40.18 JP40.20 JP40.22 JP40.24 JP40.26 JP40.28 JP40.30 JP41.2 JP41.4 JP41.6 JP41.8 JP41.10 JP41.12 JP41.14 JP41.16 LED6.C R2.2 R4.2 R6.2 R8.1 R17.2 R33.2 SW1.P$3 SW1.P$4 SW2.P$3 SW2.P$4 U1.2 U2.P$2 U3.2 U4.2 U5.4 U5.9 U5.10 U5.11 U5.22 U5.23 U5.35 U5.36 U5.41 U5.42 U5.47 U5.48 U5.THERMAL U6.2 U7.4 U7.9 U8.49 U9.11 U10.2 U11.P$2 U12.P$2 U12.P$3@0 U12.P$3@1 U12.P$3@2 U12.P$3@3 U13.P$3@0 U13.P$3@1 U13.P$3@2 U13.P$3@3
HM01B0_+1V8: J1.P$10 JP16.2 R28.1 R29.1
HM01B0_+2V8: J1.P$4 J1.P$11 JP17.2
HM01B0_D0: J1.P$14 SJ9.1 U8.35
HM01B0_D1: J1.P$3 SJ1.1 U8.23
HM01B0_D2: J1.P$9 SJ6.1 U8.31
HM01B0_D3: J1.P$5 SJ2.1 U8.25
HM01B0_D4: J1.P$12 SJ7.1 U8.32
HM01B0_D5: J1.P$20 SJ14.1 U8.40
HM01B0_D6: J1.P$19 SJ13.1 U8.39
HM01B0_D7: J1.P$13 SJ8.1 U8.34
HM01B0_HS: J1.P$16 SJ10.1 U8.36
HM01B0_INT: J1.P$18 LED3.C SJ12.1 U8.38
HM01B0_MCK: J1.P$8 SJ5.1 U8.28
HM01B0_PCLK: J1.P$17 SJ11.1 U8.37
HM01B0_SCL: J1.P$21 R29.2 SJ15.1 U8.41
HM01B0_SDA: J1.P$22 R28.2 SJ16.1 U8.42
HM01B0_TRIG: J1.P$7 LED5.C SJ4.1 U8.27
HM01B0_VS: J1.P$6 SJ3.1 U8.26
I2S_WS: JP40.29 U8.21 U12.P$1 U13.P$1
ICE40_+1V2_CORE: C34.2 C35.2 C36.2 C37.2 JP20.2 U8.5 U8.30
ICE40_+1V2_PLL: JP5.2 R25.1
ICE40_CRESETB: C54.2 R26.2 SW1.P$1 SW1.P$2 U5.20 U8.8
ICE40_FLASH_CIPO: JP40.21 JP40.27 U5.15 U7.2 U8.17 U12.P$6 U13.P$6
ICE40_FLASH_COPI: JP40.15 LED4.C U5.14 U7.5 U8.14
ICE40_FLASH_PS: JP40.19 R19.2 U5.17 U7.1 U8.16
ICE40_FLASH_SCK: JP40.17 R18.2 U5.13 U7.6 U8.15 U12.P$4 U13.P$4
ICE40_GPIO4: JP41.15
ICE40_GPIO43: LED6.A R38.2 SJ17.1 SW2.P$1 SW2.P$2 U8.43
ICE40_OSC_12M: JP41.1 U8.20 U11.P$3
ICE40_OSC_VCC: C49.2 JP19.2 R31.1 U11.P$4
ICE40_SPI_VCCIO1: C39.2 C40.1 JP7.2 R26.1 U8.22
ICE40_VCCIO0: C41.2 C42.1 JP8.2 JP9.2 U8.33
ICE40_VCCIO2: C43.2 C44.1 JP13.2 JP14.2 U8.1
ICE40_VCCPLL: C32.2 C33.1 R25.2 U8.29
ICE40_VPP2V5_+3V3: C38.2 JP6.2 U8.24
MEM1_!HOLD: JP25.3 JP26.3 JP40.13 U8.13
MEM1_!WP: JP23.5 JP24.5 JP40.11 U8.12
MEM1_CIPO: JP23.3 JP24.3 JP40.9 U8.11
MEM1_COPI: JP25.7 JP26.7 JP40.25 U8.19
MEM1_PS1: JP23.1 JP40.5 U8.9
MEM1_PS2: JP24.1 JP40.7 U8.10
MEM1_SCK: JP25.5 JP26.5 JP40.23 U8.18
MEM1_VCC1: JP25.1 JP31.2
MEM1_VCC2: JP26.1 JP32.2
MEM2_!WP: JP27.5 JP28.5 JP41.9 U8.48
MEM2_CIPO1: JP27.3 JP41.7 U8.47
MEM2_CIPO2: JP28.3 U8.4
MEM2_COPI1: JP29.7 JP41.11 U8.2
MEM2_COPI2: JP30.7 U8.44
MEM2_PS1: JP27.1 JP41.3 U8.45
MEM2_PS2: JP28.1 JP41.5 U8.46
MEM2_SCK: JP29.5 JP30.5 JP41.13 U8.3
MEM2_VCC1: JP29.1 JP33.2 JP34.2
MEM2_VCC2: JP30.1 JP35.2 JP36.2
MIC1_VCC: C50.2 C51.2 JP37.2 U12.P$5
MIC2_VCC: C52.2 C53.2 JP38.2 U13.P$2 U13.P$5
N$1: R5.2 R6.1 U4.4
N$2: R1.2 R2.1 U1.4
N$3: JP1.2 R22.1 U9.3
N$4: C18.2 FB2.2 U5.3
N$5: C17.2 FB1.2 U5.8
N$6: R3.2 R4.1 U3.4
N$7: R7.2 U2.P$1
N$8: R9.1 R11.2 U6.1
N$9: R8.2 U5.5
N$10: R9.2 U5.43 U6.3
N$11: R13.2 U5.45 U6.5
N$12: R12.2 U5.44 U6.4
N$13: R14.1 U5.32
N$14: C21.2 R10.2 U5.34
N$15: LED1.C R14.2
N$16: R16.2 R17.1 U5.31
N$17: R15.1 U5.33
N$18: LED2.C R15.2
N$19: R20.2 U7.3
N$20: R21.2 U7.7
N$21: JP2.2 R23.1 U9.5
N$22: JP3.2 R24.1 U9.10
N$23: JP10.1 U9.1
N$24: JP11.1 U9.7
N$25: JP12.1 U9.8
N$26: JP15.1 U9.14
N$28: R30.2 R33.1 U10.4
N$29: JP18.2 R32.1 U9.12
N$30: JP21.1 R31.2 U11.P$1
N$31: LED3.A R27.2
N$32: LED4.A R36.2
N$33: LED5.A R37.2
N$35: JP39.1 SJ1.2
N$36: JP39.3 SJ2.2
N$37: JP39.5 SJ3.2
N$38: JP39.7 SJ4.2
N$39: JP39.9 SJ5.2
N$40: JP39.11 SJ6.2
N$41: JP39.13 SJ7.2
N$42: JP39.15 SJ8.2
N$43: JP39.17 SJ9.2
N$44: JP39.19 SJ10.2
N$45: JP39.21 SJ11.2
N$46: JP39.23 SJ12.2
N$47: JP39.25 SJ13.2
N$48: JP39.27 SJ14.2
N$49: JP39.29 SJ15.2
N$50: JP39.31 SJ16.2
N$51: JP39.33 SJ17.2
QWIIC_+3V3: J3.P$2 JP22.2 R34.1 R35.1
QWIIC_SCL: J3.P$4 JP40.3 R35.2 U8.7
QWIIC_SDA: J3.P$3 JP40.1 R34.2 U8.6
VCCA: C4.2 U5.37
VCCCORE: C5.2 U5.38
VUSB: C1.2 C2.2 C6.2 C8.2 C10.2 C12.1 C45.2 J2.1 R16.1 U1.1 U1.3 U3.1 U3.3 U4.1 U4.3 U5.40 U10.1 U10.3

## Tracks (layer width: path | path; a pad name or v marks a point on that pad's centre or on a via)
+1V2  (5 unrouted)
+1V2_METERED  (5 unrouted)
+1V8  (8 unrouted)
+1V8_METERED  (8 unrouted)
+2V8  (4 unrouted)
+2V8_METERED  (4 unrouted)
+3V3  (23 unrouted)
+3V3_METERED  (16 unrouted)
  Top 0.152: R22.2 23.95,83.75 24.05,83.66 25.05,83.66
CONFIG_FLASH_+3V3  (7 unrouted)
D+  (1 unrouted)
  Top 0.152: U5.7 21.65,38.2
D-  (1 unrouted)
  Top 0.152: U5.6 21.15,38.2
FT232_OSC_12M  (1 unrouted)
FT232_VCCD  (21 unrouted)
GND  (via drill 0.25)  (17 unrouted)
  other vias: 70.35,52.3 65.88,52.3 68.1,54.55 70.35,56.77 65.88,56.77 80.85,55.85 80.05,55.85
  pour Top: -1,-1 161,-1 161,111 -1,111
  pour Route2: -1,-1 161,-1 161,111 -1,111
  pour Bottom: -1,-1 161,-1 161,111 -1,111
HM01B0_+1V8  (3 unrouted)
HM01B0_+2V8  (2 unrouted)
HM01B0_D0  (1 unrouted)
  Top 0.152: 83.7,55.3 J1.P$14 78.8,55.3 77.3,56.8 U8.35
HM01B0_D1  (via drill 0.25)  (1 unrouted)
  Top 0.152: U8.23 70.35,50.48 70.72,50.1 77.4,50.1 77.7,49.8 J1.P$3
  Bottom 0.152: v85.2,48.55 SJ1.1
HM01B0_D2  (1 unrouted)
  Top 0.152: U8.31 76.15,54.8 76.7,54.8 78.7,52.8 J1.P$9 83.7,52.8
HM01B0_D3  (via drill 0.25)  (1 unrouted)
  Top 0.152: 85.6,49.3 85.2,49.3 83.7,50.8 J1.P$5 78.3,50.8 77.3,51.8 U8.25
  Bottom 0.152: v87.6,49.3 SJ2.1
HM01B0_D4  (1 unrouted)
  Top 0.152: 83.7,54.3 J1.P$12 78.3,54.3 77.3,55.3 U8.32
HM01B0_D5  (1 unrouted)
  Top 0.152: 83.7,58.3 J1.P$20 80.97,58.3 80.96,58.29 78.31,58.29 77.3,59.3 72.6,59.3 72.3,59.6 69.95,59.6 69.35,59 U8.40
HM01B0_D6  (1 unrouted)
  Top 0.152: 83.7,57.8 J1.P$19 78.3,57.8 77.3,58.8 72.6,58.8 72.3,59.1 70.1,59.1 69.85,58.85 U8.39
HM01B0_D7  (1 unrouted)
  Top 0.152: 83.7,54.8 J1.P$13 78.7,54.8 77.3,56.2 73,56.2 72.8,56.4 72.4,56.4 72.3,56.3 U8.34
HM01B0_HS  (1 unrouted)
  Top 0.152: 83.7,56.3 J1.P$16 81.12,56.3 81.06,56.36 78.24,56.36 77.3,57.3 U8.36
HM01B0_INT  (3 unrouted)
  Top 0.152: 83.7,57.3 J1.P$18 78.3,57.3 77.3,58.3 72.6,58.3 | U8.38 70.35,58.5 70.45,58.6 72.3,58.6
HM01B0_MCK  (1 unrouted)
  Top 0.152: 83.7,52.3 J1.P$8 78.3,52.3 77.3,53.3 U8.28
HM01B0_PCLK  (1 unrouted)
  Top 0.152: 83.7,56.8 J1.P$17 78.3,56.8 77.3,57.8 72.5,57.8 72.35,57.95 U8.37
HM01B0_SCL  (via drill 0.25 pad 0.25)  (1 unrouted)
  Top 0.152: 83.7,58.8 J1.P$21 v80.75,58.8 78.3,58.8 77.3,59.8 72.6,59.8 72.3,60.1 69.85,60.1 68.85,59.1 U8.41 | R29.2 v80.75,60.75
  Bottom 0.152: v80.75,60.75 v80.75,58.8
HM01B0_SDA  (1 unrouted)
  Top 0.152: 83.7,59.3 J1.P$22 80.97,59.3 80.96,59.31 80.54,59.31 80.53,59.3 79.8,59.3 | U8.42 68.35,59.15 69.8,60.6 72.3,60.6 72.6,60.3 77.3,60.3 78.3,59.3 79.8,59.3 | R28.2 79.8,59.3
HM01B0_TRIG  (via drill 0.25)  (2 unrouted)
  Top 0.152: v87.6,50.84 84.66,50.84 83.7,51.8 J1.P$7 78.3,51.8 77.3,52.8 U8.27
HM01B0_VS  (via drill 0.25)
  Top 0.152: v85.2,50.05 84.95,50.05 83.7,51.3 J1.P$6 78.3,51.3 77.3,52.3 U8.26
  Bottom 0.152: SJ3.1 v85.2,50.05
I2S_WS  (3 unrouted)
ICE40_+1V2_CORE  (5 unrouted)
  Bottom 0.152: C36.2 C37.2
ICE40_+1V2_PLL  (via drill 0.25)  (1 unrouted)
  Top 0.152: 71.5,54.3 72.32,54.3 v72.38,54.23
  Bottom 0.152: R25.1 71.27,53.22 71.42,53.37 72.03,53.37 72.38,53.72 v72.38,54.23 72.38,54.74 72.13,54.99
ICE40_CRESETB  (5 unrouted)
ICE40_FLASH_CIPO  (6 unrouted)
ICE40_FLASH_COPI  (4 unrouted)
ICE40_FLASH_PS  (4 unrouted)
ICE40_FLASH_SCK  (6 unrouted)
ICE40_GPIO43  (5 unrouted)
ICE40_OSC_12M  (2 unrouted)
ICE40_OSC_VCC  (3 unrouted)
ICE40_SPI_VCCIO1  (via drill 0.25)  (2 unrouted)
  Top 0.152: U8.22 69.85,50.26 v69.89,50.22
  Bottom 0.152: v69.89,50.22 69.08,50.22 C39.2 69.02,50.18 C40.1
ICE40_VCCIO0  (4 unrouted)
ICE40_VCCIO2  (via drill 0.25 pad 0.25)  (2 unrouted)
  Top 0.152: U8.1 63.85,57.3 v63.8,57.35
  Bottom 0.152: v63.8,57.35 64.2,57.75 C43.2 C44.1
ICE40_VCCPLL  (via drill 0.25)
  Top 0.152: U8.29 72.1,53.8 72.17,53.72 72.89,53.72 v72.99,53.83
  Bottom 0.152: C33.1 72.99,52.69 72.99,52.81 | 72.99,52.81 v72.99,53.83 | 72.99,52.81 C32.2 71.78,52.81 71.66,52.69 71.37,52.69 71.27,52.59 R25.2 | 72.99,52.81
ICE40_VPP2V5_+3V3  (via drill 0.25)  (1 unrouted)
  Top 0.152: U8.24 71.35,51.15 71.47,51.03 v71.47,50.62
  Bottom 0.152: C38.2 71.11,50.98 v71.47,50.62
MEM1_!HOLD  (3 unrouted)
MEM1_!WP  (3 unrouted)
MEM1_CIPO  (3 unrouted)
MEM1_COPI  (3 unrouted)
MEM1_PS1  (2 unrouted)
MEM1_PS2  (2 unrouted)
MEM1_SCK  (3 unrouted)
MEM1_VCC1  (1 unrouted)
MEM1_VCC2  (1 unrouted)
MEM2_!WP  (3 unrouted)
MEM2_CIPO1  (2 unrouted)
MEM2_CIPO2  (1 unrouted)
MEM2_COPI1  (2 unrouted)
MEM2_COPI2  (1 unrouted)
MEM2_PS1  (2 unrouted)
MEM2_PS2  (2 unrouted)
MEM2_SCK  (3 unrouted)
MEM2_VCC1  (2 unrouted)
MEM2_VCC2  (2 unrouted)
MIC1_VCC  (3 unrouted)
MIC2_VCC  (4 unrouted)
N$1  (2 unrouted)
N$2  (2 unrouted)
N$3  (1 unrouted)
  Top 0.152: JP1.2 20.89,83.91 21.3,83.5 22.35,83.5 22.7,83.15 22.7,82.95 23,82.65 R22.1 23.95,83.25 24.05,83.35 25.05,83.35 25.2,83.2
N$4  (2 unrouted)
N$5  (2 unrouted)
N$6  (2 unrouted)
N$7  (1 unrouted)
N$8  (2 unrouted)
N$9  (1 unrouted)
N$10  (2 unrouted)
N$11  (2 unrouted)
N$12  (2 unrouted)
N$13  (1 unrouted)
N$14  (2 unrouted)
N$15  (1 unrouted)
N$16  (2 unrouted)
N$17  (1 unrouted)
N$18  (1 unrouted)
N$19  (1 unrouted)
N$20  (1 unrouted)
N$21  (2 unrouted)
N$22  (2 unrouted)
N$23  (1 unrouted)
N$24  (1 unrouted)
N$25  (1 unrouted)
N$26  (1 unrouted)
N$28  (2 unrouted)
N$29  (2 unrouted)
N$30  (2 unrouted)
N$31  (1 unrouted)
N$32  (1 unrouted)
N$33  (1 unrouted)
N$35  (via drill 0.25)  (1 unrouted)
  Bottom 0.152: SJ1.2 v87.6,48.55
N$36  (1 unrouted)
N$37  (via drill 0.25)  (1 unrouted)
  Bottom 0.152: SJ3.2 v87.6,50.05
N$38  (1 unrouted)
N$39  (via drill 0.25)  (1 unrouted)
  Bottom 0.152: SJ5.2 v87.6,51.55
N$40  (1 unrouted)
N$41  (via drill 0.25)  (1 unrouted)
  Bottom 0.152: SJ7.2 v87.6,53.05
N$42  (1 unrouted)
N$43  (via drill 0.25)  (1 unrouted)
  Bottom 0.152: SJ9.2 v87.6,54.55
N$44  (1 unrouted)
N$45  (via drill 0.25)  (1 unrouted)
  Bottom 0.152: SJ11.2 v87.6,56.05
N$46  (1 unrouted)
N$47  (via drill 0.25)  (1 unrouted)
  Bottom 0.152: SJ13.2 v87.6,57.55
N$48  (1 unrouted)
N$49  (via drill 0.25)  (1 unrouted)
  Bottom 0.152: SJ15.2 v87.6,59.05
N$50  (1 unrouted)
N$51  (via drill 0.25)  (1 unrouted)
  Bottom 0.152: SJ17.2 v87.6,60.55
N$74  (via drill 0.25)
  other vias: 72.6,55.85
QWIIC_+3V3  (3 unrouted)
QWIIC_SCL  (3 unrouted)
QWIIC_SDA  (3 unrouted)
VCCA  (1 unrouted)
VCCCORE  (1 unrouted)
VUSB  (17 unrouted)

## Text on the board
tPlace: +2v8 | +1v2 | +1v8 | +3v3 | gnd | 100mV / mA